# EAGLE board board (EAGLE 9.4.0)
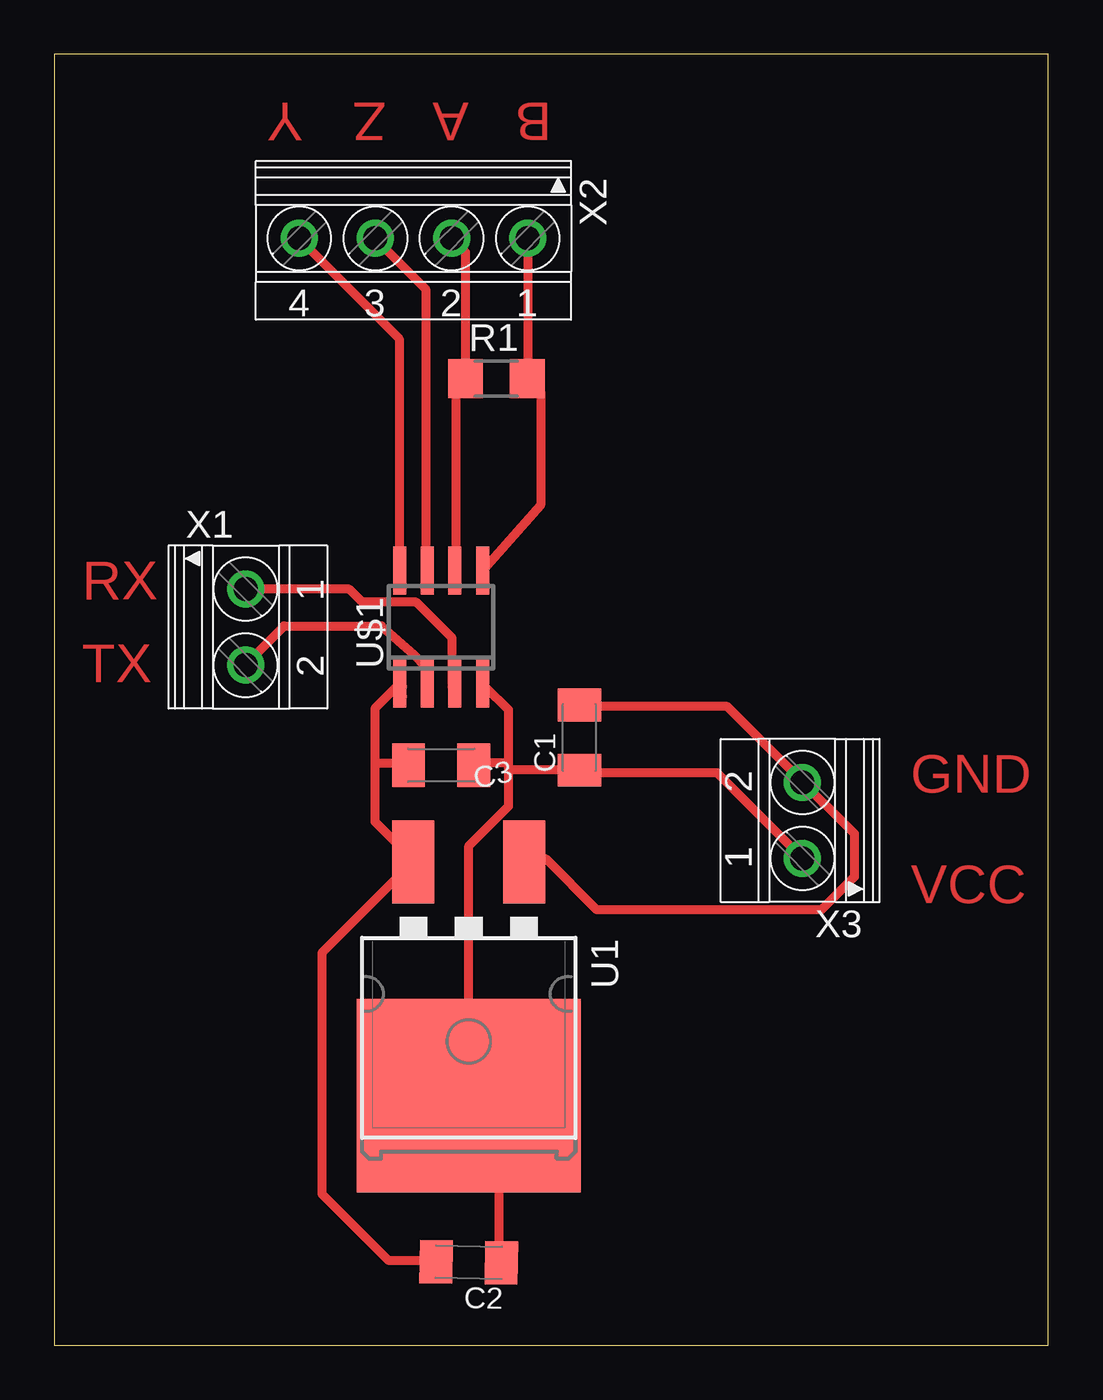
[diagram p0: board, top side]

Size 45.7 x 59.36 mm. Coordinates in mm from the lower left corner, seen from the top.
Outline: 0,0 45.7,0 45.7,59.36 0,59.36 0,0
Copper layers (1*16): Top 0.035mm / dielectric 1.5mm / Bottom 0.035mm
Design rules "default": minimum track width 6mil, minimum drill 0.35mm, track to track 6mil, track to pad 6mil, pad to pad 6mil, via to via 6mil, smd to smd 6mil, copper to edge 40mil, drill to drill 6mil, minimum pad ring 10mil, minimum via ring 8mil, stop-mask expansion 4mil, vias tented up to drill 0mil, thermal gap 10mil

## Footprints (pad centres in the part's own frame; a part is rotated, then mirrored left to right if it is on the bottom)
C1206K = smd 1.5 x 2: 1 -1.5,0; 2 1.5,0
R1206 = smd 1.6 x 1.803: 1 -1.422,0; 2 1.422,0
D2PAK = smd 1.93 x 3.81: 1 -2.55,-8.25; 3 2.55,-8.25 | smd 10.3 x 8.9: 2 0,2.5
SOIC8 = smd 0.6 x 2.2: 1 -1.905,-2.6; 2 -0.635,-2.6; 3 0.635,-2.6; 4 1.905,-2.6; 5 1.905,2.6; 6 0.635,2.6; 7 -0.635,2.6; 8 -1.905,2.6
1751248 = drill 1.1 pad 1.7: 1 -1.75,-0.1; 2 1.75,-0.1
1751264 = drill 1.1 pad 1.7: 1 -5.25,-0.1; 2 -1.75,-0.1; 3 1.75,-0.1; 4 5.25,-0.1

## Placement (x,y rotation side)
C1  330nF  [C1206K]  24.13,27.94 90 top
C2  100nF  [C1206K]  19.05,3.81 179 top
C3  100nF  [C1206K]  17.78,26.67 180 top
R1  120  [R1206]  20.32,44.45 0 top
U1  LM7805 TO263  [D2PAK]  19.05,13.97 180 top
U$1  DS8921  [SOIC8]  17.78,33.02 0 top
X1  1751248  [1751248]  8.89,33.02 270 top
X2  1751264  [1751264]  16.51,50.8 180 top
X3  [1751248]  34.29,24.13 90 top

## Library data of the parts
C1-C3 = rcl; SPICEPREFIX: C
R1 = rcl; SPICEPREFIX: R
U1 = v-reg-3
U$1 = ref-packages
X1 X3 = con-phoenix-350; OC_FARNELL: unknown; OC_NEWARK: unknown
X2 = con-phoenix-350; MPN: 1751264; OC_FARNELL: unknown; OC_NEWARK: 10R0934

## Nets
N$1: C1.1 C2.1 C3.1 U1.2 U$1.4 X3.1
N$2: C1.2 U1.1 X3.2
N$3: C2.2 C3.2 U1.3 U$1.1
N$4: U$1.2 X1.2
N$5: U$1.3 X1.1
N$7: R1.2 U$1.5 X2.1
N$8: U$1.7 X2.3
N$9: U$1.8 X2.4
N$10: R1.1 U$1.6 X2.2

## Tracks (layer width: path | path; a pad name or v marks a point on that pad's centre or on a via)
N$1
  Top 0.406: U$1.4 19.81,30.28 20.88,29.21 20.88,26.77 | 34.44,22.5 X3.1 34.29,22.5 30.48,26.31 24.23,26.31 C1.1 24.08,26.47 20.88,26.47 | 20.57,3.76 C2.1 20.42,3.91 20.42,10.01 19.05,11.38 U1.2 19.05,22.96 20.88,24.79 20.88,26.47 | 19.3,26.77 C3.1 19.35,26.77 20.88,26.77 | 20.88,26.47 20.88,26.77
N$2
  Top 0.406: U1.1 21.64,22.35 22.61,22.35 24.94,20.01 35.25,20.01 36.78,21.54 36.78,23.52 35.42,24.88 35.37,24.9 X3.2 34.29,26.01 30.94,29.36 24.23,29.36 C1.2
N$3
  Top 0.406: 16.41,26.77 C3.2 16.15,26.77 14.73,26.77 | 17.68,3.76 C2.2 17.53,3.91 15.34,3.91 12.29,6.96 12.29,18.03 16.46,22.2 U1.3 | U$1.1 16,30.28 16,29.82 U$1.1 | 16.61,22.35 U1.3 | U$1.1 14.73,29.28 14.73,26.77 | 14.73,26.77 14.73,24.08 16.46,22.35 U1.3
N$4
  Top 0.406: 17.07,31.04 17.07,30.43 U$1.2 17.07,31.04 | 17.07,31.04 17.07,31.19 16.51,31.75 15.04,33.07 10.57,33.07 8.84,31.34 X1.2
N$5
  Top 0.406: 18.29,30.28 U$1.3 18.29,30.43 18.29,32.51 16.64,34.16 14.16,34.16 13.55,34.77 X1.1 8.84,34.7
N$7
  Top 0.406: U$1.5 22.35,38.63 22.35,43.84 R1.2 21.79,44.45 21.79,50.85 X2.1
N$8
  Top 0.406: U$1.7 17.07,35.76 17.07,48.56 14.78,50.85 X2.3
N$9
  Top 0.406: U$1.8 15.85,35.76 15.85,46.28 11.28,50.85 X2.4
N$10
  Top 0.406: U$1.6 18.44,35.76 18.44,43.99 R1.1 | R1.1 | R1.1 18.9,50.24 18.29,50.85 X2.2

## Text on the board
Top: Y | Z | A | B | RX | TX | GND | VCC